# EAGLE board sensor_v8 (EAGLE 7.1.0)
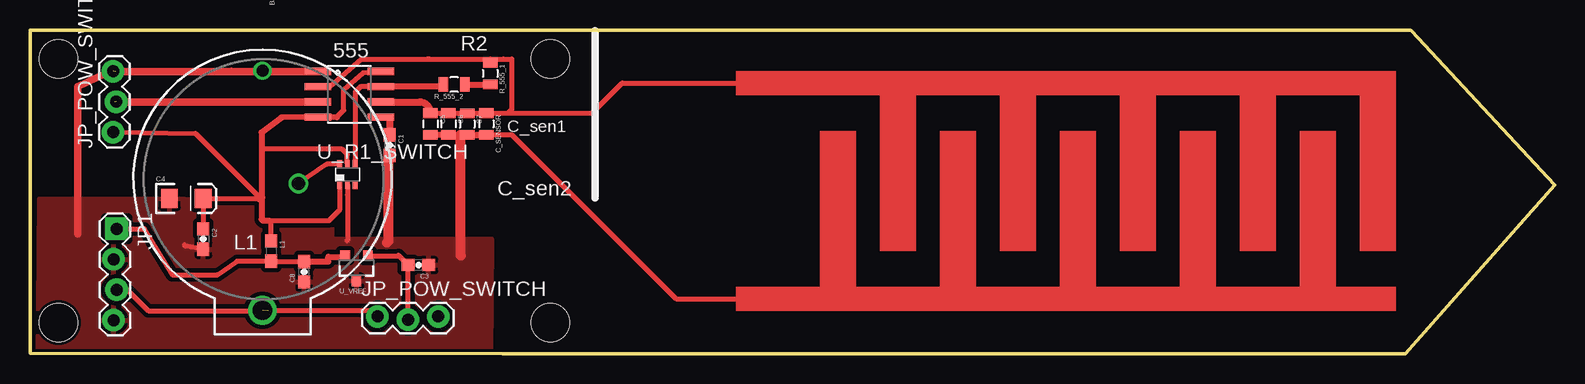
[diagram p0: board, top side]
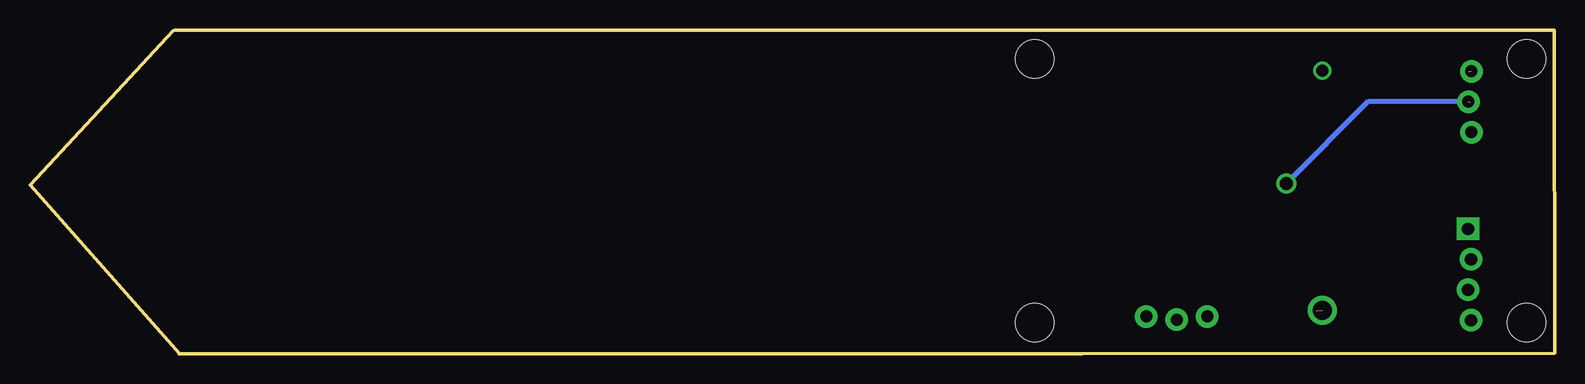
[diagram p1: board, bottom side, seen from below]

Size 127.1 x 27.03 mm. Coordinates in mm from the lower left corner, seen from the top.
Outline: 115.16,26.98 127.1,14.07 114.63,0.02
Outline: 0.03,27.02 0,0.08
Outline: 115.05,27.02 0.08,27.03
Outline: 0.02,0.05 39.4,0.01 114.64,0
Copper layers (1*16): Top 0.035mm / dielectric 1.5mm / Bottom 0.035mm
Design rules "Fusion_eagle_rule_v1.1 *": minimum track width 12mil, minimum drill 12mil, track to track 14mil, track to pad 14mil, pad to pad 14mil, via to via 14mil, smd to smd 0mil, copper to edge 10mil, drill to drill 10mil, minimum pad ring 10mil, minimum via ring 6mil, stop-mask expansion 2mil, vias tented up to drill 100mil, thermal gap 10mil
Holes 3.2 mm at 43.36,24.6 43.36,2.6 2.36,24.6 2.36,2.6

## Footprints (pad centres in the part's own frame; a part is rotated, then mirrored left to right if it is on the bottom)
BATTCOM_20MM_PTH = drill 1.6: 1 19.99,0 | drill 1: 2 0,0
0603-CAP = smd 1.1 x 1: 1 -0.85,0; 2 0.85,0
EIA3216 = smd 1.4 x 1.6: A 1.4,0; C -1.4,0
0805 = smd 0.8 x 1.2: 1 -0.9,0; 2 0.9,0
1X04_LOCK = drill 1.016 pad 1.88 square: 1 0,0.127 | drill 1.016 pad 1.88: 2 2.54,-0.127; 3 5.08,0.127; 4 7.62,-0.127
1X03_LOCK = drill 1 pad 1.88: 1 0,0.127; 2 2.54,-0.127; 3 5.08,0.127
0603 = smd 1.1 x 1: 1 -0.85,0; 2 0.85,0
SO08 = smd 0.61 x 2.21: 1 -1.905,-2.616; 2 -0.635,-2.616; 3 0.635,-2.616; 4 1.905,-2.616; 5 1.905,2.616; 6 0.635,2.616; 7 -0.635,2.616; 8 -1.905,2.616
DCK_R-PDSO-G6 = smd 0.4 x 0.7: 1 -0.65,-0.85; 2 0,-0.85; 3 0.65,-0.85; 4 0.65,0.85; 5 0,0.85; 6 -0.65,0.85
SOT23-3 = smd 0.8 x 0.9: 1 -0.95,-1; 2 0.95,-1; 3 0,1.1

## Placement (x,y rotation side)
BAT1  [BATTCOM_20MM_PTH]  19.38,23.62 270 top
C1  [0603-CAP]  29.99,17.43 270 top
C2  [0603-CAP]  14.44,9.59 270 top
C3  [0603-CAP]  32.38,7.42 180 top
C4  [EIA3216]  13.03,12.98 0 top
C5  [0805]  33.39,19.19 270 top
C6  [0805]  34.89,19.19 270 top
C7  [0805]  36.45,19.18 270 top
C8  [0603-CAP]  22.86,6.85 90 top
C_SENSOR  [0805]  38.04,19.19 270 top
JP1  [1X04_LOCK]  7.1,10.43 270 top
JP_POW_SWITCH  [1X03_LOCK]  28.96,2.99 0 top
JP_POW_SWITCH1  [1X03_LOCK]  7.06,18.5 90 top
L1  [0603]  20.09,8.58 270 top
R_555_1  CALC  [0805]  38.36,23.4 270 top
R_555_2  CALC  [0805]  35.36,22.48 180 top
U_7555  DS1307SO8  [SO08]  26.63,21.66 270 top
U_R1_SWITCH  741G3157DCKR  [DCK_R-PDSO-G6]  26.46,14.98 0 top
U_VREF  [SOT23-3]  27.22,7.2 180 top

## Library data of the parts
BAT1 = semipassiveTag_library
C1-C4 C8 = SparkFun-Capacitors
C5-C7 C_SENSOR U_VREF = SparkFun
JP1 JP_POW_SWITCH JP_POW_SWITCH1 = SparkFun-Connectors
L1 = SparkFun-Passives
R_555_1 R_555_2 = SparkFun-Resistors
U_7555 = SparkFun-FreqCtrl
U_R1_SWITCH = 74xx-little-de

## Nets
FOUT: JP_POW_SWITCH1.2 U_7555.3 U_R1_SWITCH.6
GND: BAT1.2 C1.2 C2.2 C3.1 C4.C C5.2 C6.2 C7.2 C8.1 C_SENSOR.2 JP1.2 JP1.4 JP_POW_SWITCH1.3 U_7555.1 U_R1_SWITCH.2 U_VREF.3
N$6: BAT1.1 JP1.3 JP_POW_SWITCH.1
N$9: R_555_1.2 R_555_2.1
P2: C5.1 C6.1 C7.1 C_SENSOR.1 R_555_1.1 U_7555.2 U_7555.6
P5: C1.1 U_7555.5
P7: R_555_2.2 U_7555.7 U_R1_SWITCH.4
VCC: U_R1_SWITCH.5
VDD: C2.1 C4.A JP_POW_SWITCH1.1 L1.1 U_7555.4 U_7555.8 U_R1_SWITCH.1
VREFIN: C3.2 JP_POW_SWITCH.2 U_VREF.1
VREFOUT: C8.2 JP1.1 L1.2 U_VREF.2

## Tracks (layer width: path | path; a pad name or v marks a point on that pad's centre or on a via)
FOUT  (via drill 0.6, 1.1)  (1 unrouted)
  Top 0.4: U_R1_SWITCH.6 24.74,15.83 v22.37,14.23
  Top 0.61: 24,21.02 arc45 U_7555.3 v7.05,21.03
  Bottom 0.406: JP_POW_SWITCH1.2 15.56,21.04 v22.37,14.23
GND  (1 unrouted)
  Top 0.4: U_R1_SWITCH.2 26.46,13.29
  Top 0.406: C5.2 35.86,18.29 | C2.2 12.95,9.01 12.86,9.1 | 37.96,18.3 37.16,18.3 | C_SENSOR.2 37.97,18.29 37.96,18.3 | 16.78,23.69 16.66,23.57 | 37.96,18.3 40.16,18.3 53.86,4.6 60.86,4.6 | 26.46,13.29 26.46,9.47 26.43,9.44
  Top 0.5: C5.2 C6.2 35.86,18.29 C7.2 C_SENSOR.2
  Top 0.61: BAT1.2 19.43,23.57 U_7555.1 16.66,23.57 7.16,23.57 7.16,23.8 3.96,22.3 3.96,10
  Top 0.813: C1.2 29.86,16.58 29.86,9.41 29.74,9.29 | 35.86,18.29 35.86,8.25 35.9,8.21
  pour Top: 0.82,12.98 25.12,12.88 25.16,9.6 38.46,9.6 38.36,-5.3 0.66,-5.3
N$4
  Top 0.4: 26.44,16.61 26.44,16.66 26.02,17.08
  Top 0.406: 26.02,17.08 19.29,17.08 19.29,17.09
N$5
  Top 0.4: 26.45,15.87 26.45,16.65
N$6  (1 unrouted)
  Top 0.406: BAT1.1 28.44,3.63 JP_POW_SWITCH.1 | JP1.3 8.11,5.35 9.86,3.6 19.86,3.6
N$9
  Top 0.5: R_555_2.1 38.36,22.48 R_555_1.2
N$10
  Top 0.406: 38.36,20.1 46.86,20.1 49.36,22.6 59.86,22.6
P2
  Top 0.406: 24.09,22.27 23.96,22.27 U_7555.2 24.98,22.27 27.66,24.58 33.36,24.58 | 33.36,24.58 33.06,24.59 | C5.1 C6.1 C7.1 | C7.1 C_SENSOR.1 39.85,20.09 40.16,20.4 40.16,24.6 39.46,24.6 arc90 39.44,24.58 38.36,24.58 33.36,24.58 | 35.91,20.1 C7.1
  Top 0.5: 38.36,24.1 R_555_1.1 38.36,24.58
  Top 0.6: U_7555.6 32.45,21.03 arc-90 C5.1
P5
  Top 0.406: U_7555.5 29.99,19.76
  Top 0.6: 29.99,19.76 C1.1
P7
  Top 0.406: U_7555.7 27.56,22.3 27.11,21.85 U_R1_SWITCH.4
  Top 0.5: U_7555.7 34.46,22.3 R_555_2.2
VDD
  Top 0.406: U_7555.4 25.57,19.76 26.15,20.34 26.15,22.06 27.76,23.46 28.55,23.54 U_7555.8 | 19.18,12.93 19.14,12.98 C4.A 14.44,12.98 C2.1 | L1.1 20.09,10.98 | 20.09,10.98 19.96,11.11 | JP_POW_SWITCH1.1 13.81,18.4 19.31,12.9 | U_R1_SWITCH.1 25.81,12 24.91,11.1 20.21,11.1 20.09,10.98
  Top 0.5: 25.57,19.76 20.97,19.74 19.31,18.48 19.31,13.06 19.31,12.9 19.31,11.23 19.43,11.11 19.96,11.11
  Top 0.61: 19.18,12.93 19.31,13.06
VREFIN
  Top 0.406: JP_POW_SWITCH.2 31.5,7.39 C3.2 30.72,8.23 30.69,8.2 U_VREF.1
VREFOUT
  Top 0.406: C8.2 22.89,7.73 L1.2 17.27,7.73 15.63,6.6 11.86,6.6 9.53,10.43 JP1.1 | U_VREF.2
  Top 0.5: C8.2 24.86,7.7 24.86,8.1 26.27,8.1 U_VREF.2
(copper drawn outside any net)
  shapes: Top area x12

## Text on the board
tPlace: R2 | 555 | C_sen1 | C_sen2 | L1